# Altium PCB PCB1.PcbDoc
Units mil, origin at the board's own origin, x right, y up, seen from the top; angles counter-clockwise.
Board outline 6000 x 4000 mil, 2 copper layers (Top Layer, Bottom Layer); 23 components, 31 nets, 107 pads, 0 vias.
Unrouted connection lines stored in the file: 6.
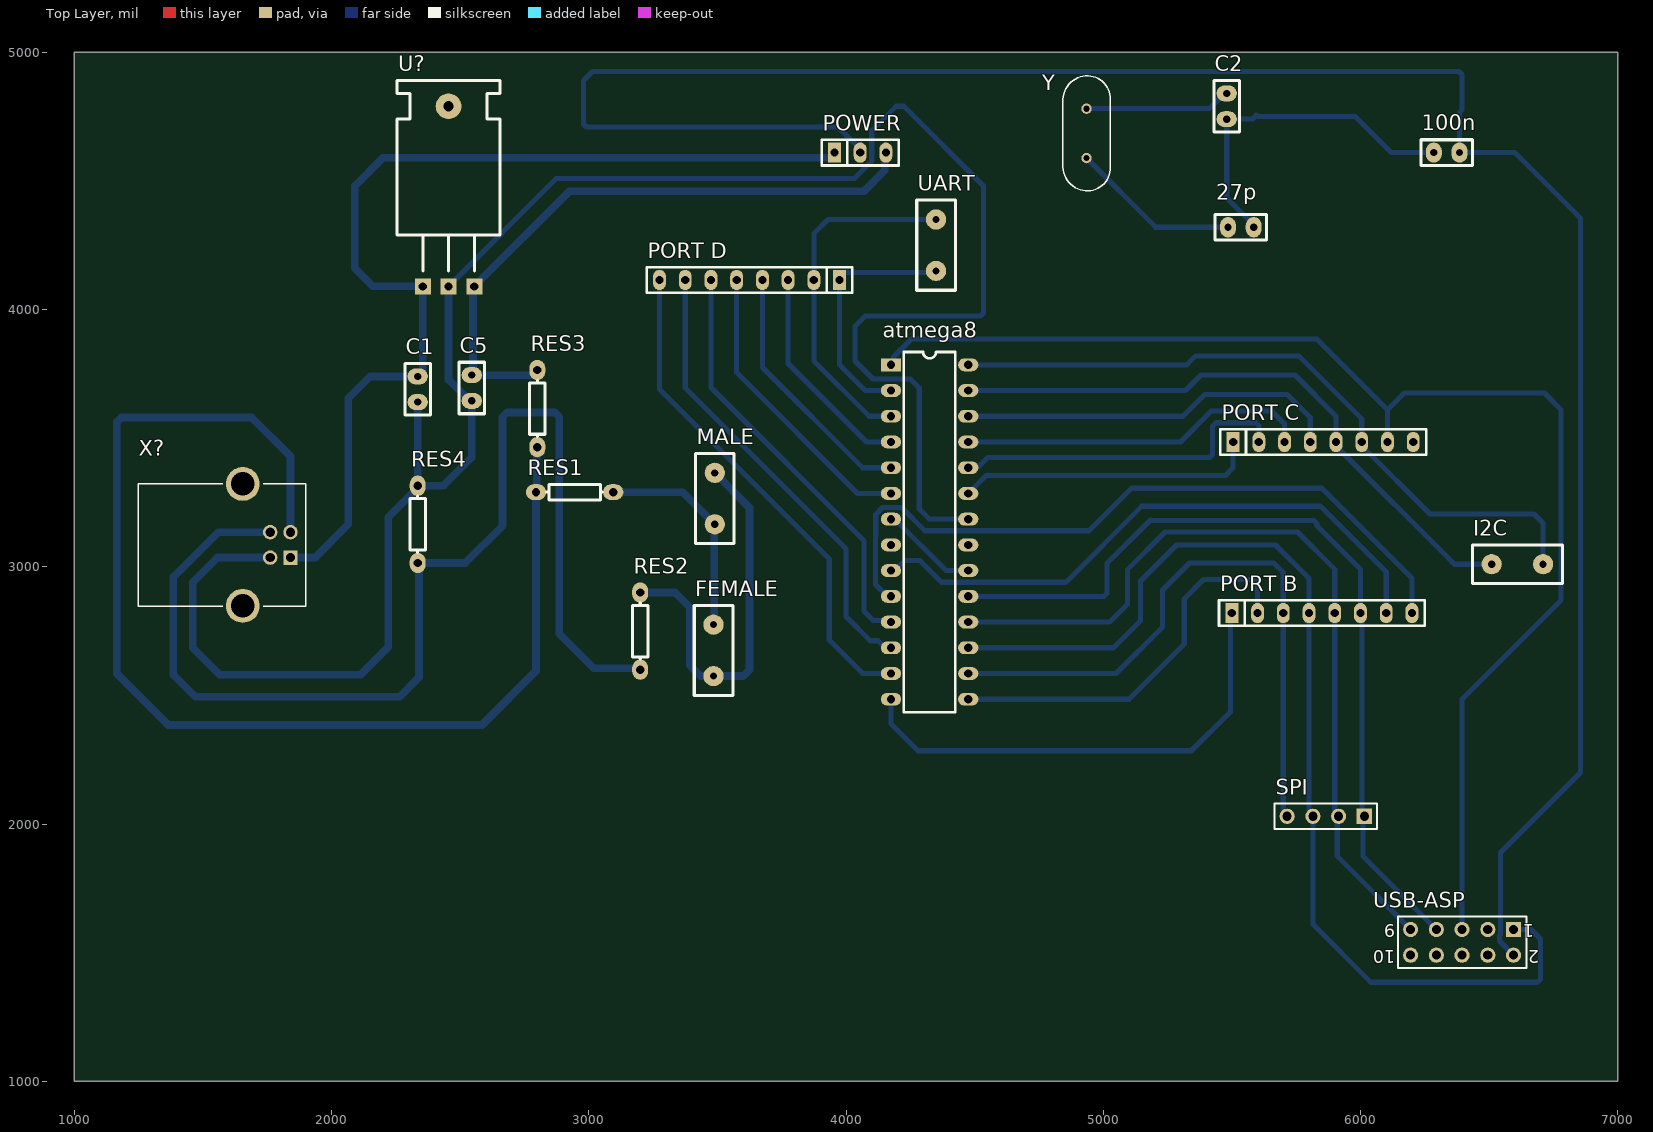
[diagram p0: Top Layer view]
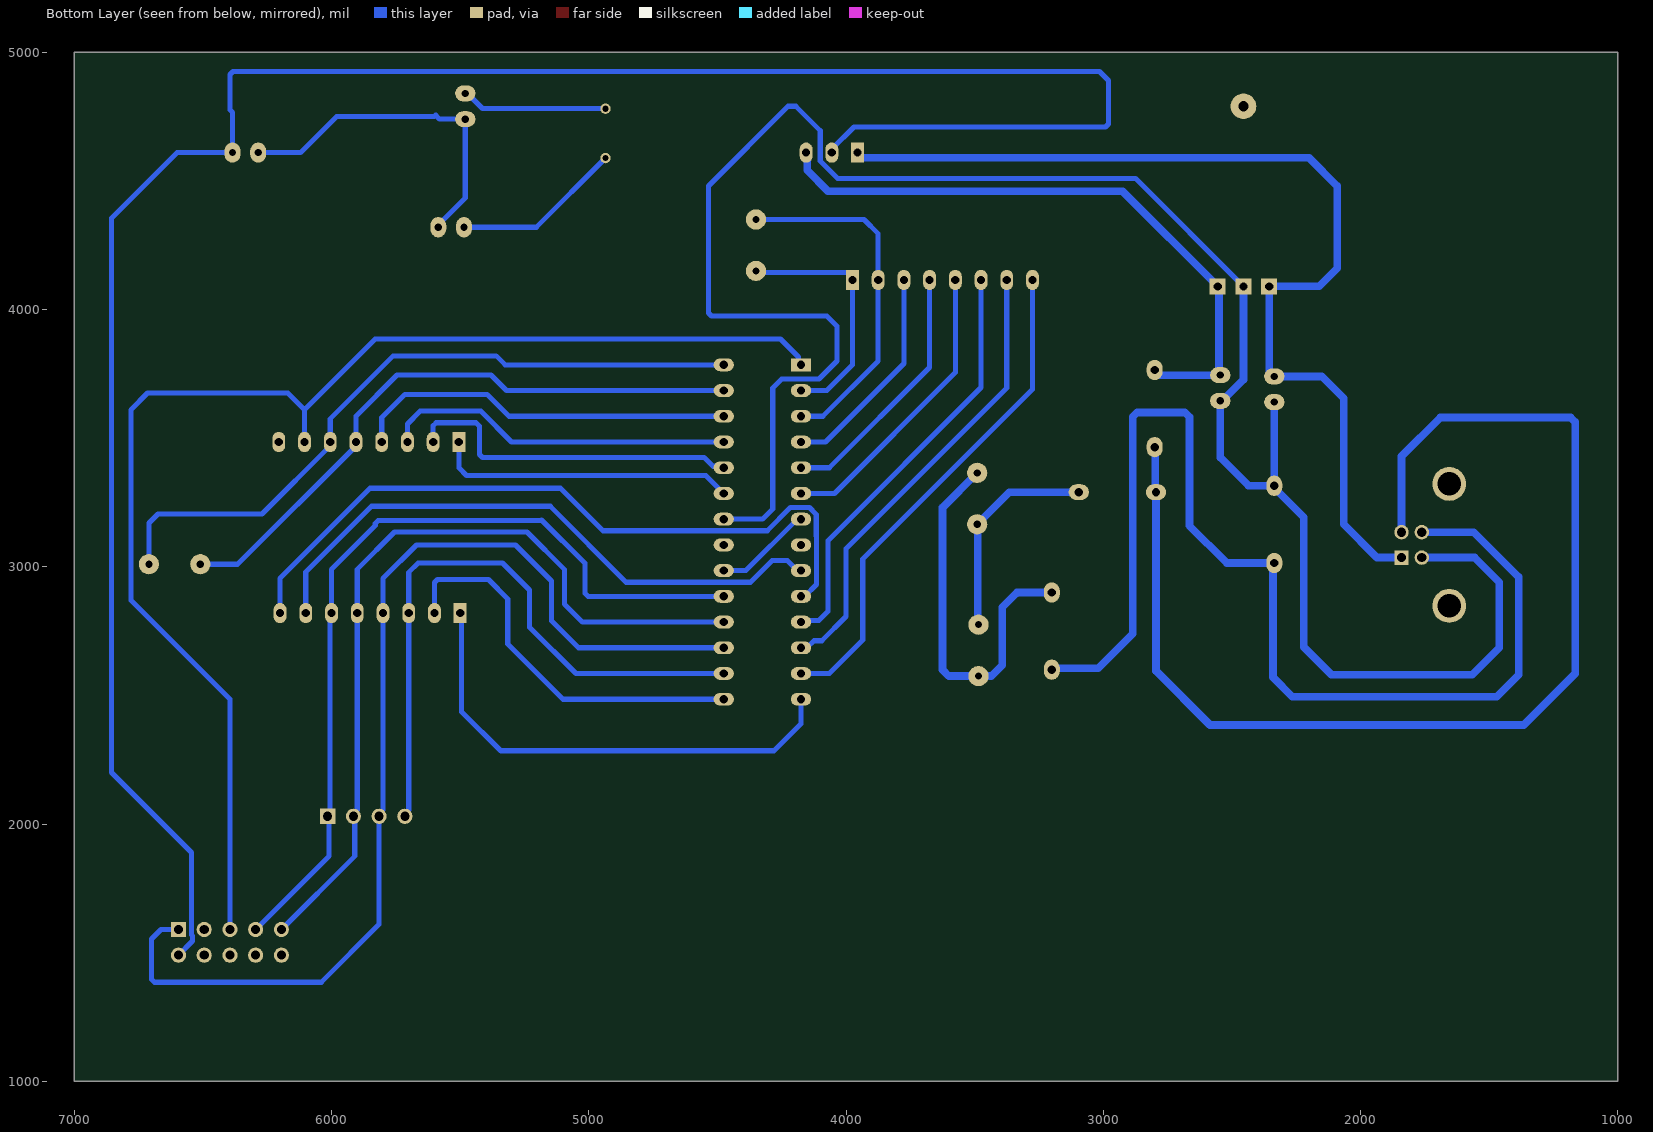
[diagram p1: Bottom Layer view, seen from below]

## Layer stack, top to bottom
Top Solder: solder mask 0.4, Solder Resist, Dk 3.5
Top Layer: signal copper 1.4
Dielectric 1: dielectric 12.6, FR-4, Dk 4.8
Bottom Layer: signal copper 1.4
Bottom Solder: solder mask 0.4, Solder Resist, Dk 3.5

## Board outline
1000,1000 7000,1000 7000,5000 1000,5000

## Design rules (kind name [scope] priority, off if disabled: settings)
Clearance [All] p1: gap=10 ignorepadtopadclearanceinfootprint=FALSE except(0: Arc-Hole Track-Hole SMDPad-Hole THPad-Hole Via-Hole Fill-Hole Poly-Hole Region-Hole Text-Hole; 25: Arc-Arc Arc-Track Track-Track)
PolygonConnect [All] p1: connectstyle=Relief reliefconductorwidth=10 reliefentries=4 polygonreliefangle="90 Angle" airgapwidth=10
RoomDefinition Sheet1 [InComponentClass('Sheet1')] p1: confinementstyle=ConfineIn formatcopy=TRUE lockcomponents=FALSE outline 7105,1110 9470,1110 9470,2630 7105,2630
RoutingLayers [All] p1: top layer_v5=FALSE bottom layer_v5=TRUE
RoutingVias [All] p1: holewidth=28 width=50 viastyle="Through Hole" minholewidth=28 minwidth=50 maxholewidth=28 maxwidth=50
SolderMaskExpansion [All] p1: expansion=4 istentingtop=FALSE
Width [All] p1: maxlimit=50 minlimit=10 preferedwidth=20 toplayer_maxwidth=10 toplayer_prefwidth=10 minimp=50.000000 maximp=50.000000 favimp=50.000000
29 further rules are at their usual default settings.

## Components (designator, comment, footprint, x,y, rotation, side; value= is the part's Value field where it differs from the comment)
27p "CAP" RAD0.1 5585,4320 r180 top
100n "CAP" RAD0.1 6385,4610 r180 top
atmega8 "ATmega8-16PI" PDIP28 4335,3525 r0 top
C1 "4u7" RAD0.1 2335,3640 r90 top
C2 "27p" RAD0.1 5480,4740 r90 top
C5 "4u7" RAD0.1 2545,3745 r270 top
FEMALE "HEADER 2" RAD0.2 3485,2775 r270 top
I2C "HEADER 2" RAD0.2 6510,3010 r0 top
MALE "HEADER 2" RAD0.2 3490,3165 r90 top
"PORT B" "HEADER 8" SIP8 5500,2820 r0 top
"PORT C" "HEADER 8" SIP8 5505,3485 r0 top
"PORT D" "HEADER 8" SIP8 3975,4115 r180 top
POWER "HEADER 3" SIP3 3955,4610 r0 top
RES1 "68" AXIAL0.3 2795,3290 r0 top
RES2 "68" AXIAL0.3 3200,2600 r90 top
RES3 "1K5" AXIAL0.3 2800,3465 r90 top
RES4 "1M" AXIAL0.3 2335,3315 r270 top
SPI "Header 4" HDR1X4 6015,2030 r180 top
U? "VOLTREG" TO-220 2355,4090 r0 top
UART "HEADER 2" RAD0.2 4350,4150 r90 top
USB-ASP "Header 5X2" HDR2X5 6595,1590 r180 top
X? "USB-B1HSB6" OST_USB-B1HSB6 1655,3085 r270 top
Y "ECS-240.0001-18-1X" XTAL_ECS-200-20-1X 4935,4685 r90 top

## Footprints (in the part's own frame and the unit in brackets; to place one, negate y for a bottom-side part, rotate by r counter-clockwise, add the part's x,y. Pads: shape width x height; smd on the part's side, far side on the other; paste and mask are expansions set on the pad)
AXIAL0.3 [mil]
  oval 78.74x62 hole 32: 1(0,0) 2(300,0)
  silkscreen extent 41,-30 259,30
HDR1X4 [mm] "Connector; Header; 4 Position"
  rect 1.5x1.5 hole 0.9: 1(0,0)
  round 1.5 hole 0.9: 2(2.54,0) 3(5.08,0) 4(7.62,0)
  silkscreen extent -1.27,-1.27 8.89,1.27
HDR2X5 [mm] "Connector; Header; 5x2 Position"
  rect 1.5x1.5 hole 0.9: 1(0,0)
  round 1.5 hole 0.9: 2(0,2.54) 3(2.54,0) 4(2.54,2.54) 5(5.08,0) 6(5.08,2.54) 7(7.62,0) 8(7.62,2.54) 9(10.16,0) 10(10.16,2.54)
  silkscreen extent -1.27,-1.27 11.43,3.81
OST_USB-B1HSB6 [mm]
  rect 1.428x1.428 / inner round 1.428 / far side rect 1.428x1.428 hole 0.92: 1(1.25,4.71)
  round 1.428 hole 0.92: 2(-1.25,4.71) 3(-1.25,2.71) 4(1.25,2.71)
  round 3.346 hole 2.33: P1(-6.02,0) P2(6.02,0)
  silkscreen extent -6.05,-10.3 6.05,6.2, body extent -7.42,-8.25 7.42,8.25, height 10.9
PDIP28 [mil]
  rect 78.74x50 hole 32: 1(-160,260)
  oval 78.74x50 hole 32: 2(-160,160) 3(-160,60) 4(-160,-40) 5(-160,-140) 6(-160,-240) 7(-160,-340) 8(-160,-440) 9(-160,-540) 10(-160,-640) 11(-160,-740) 12(-160,-840) 13(-160,-940) 14(-160,-1040) 15(140,-1040) 16(140,-940) 17(140,-840) 18(140,-740) 19(140,-640) 20(140,-540) 21(140,-440) 22(140,-340) 23(140,-240) 24(140,-140) 25(140,-40) 26(140,60) 27(140,160) 28(140,260)
  silkscreen extent -110,-1090 90,310
RAD0.1 [mil]
  oval 62x78.74 hole 28: 1(0,0) 2(100,0)
  silkscreen extent -50,-50 150,50
RAD0.2 [mm]
  round 2 hole 0.711: 1(0,0) 2(5.08,0)
  silkscreen extent -1.91,-1.91 6.98,1.91
SIP3 [mil]
  rect 50x78.74 hole 32: 1(0,0)
  oval 50x78.74 hole 32: 2(100,0) 3(200,0)
  silkscreen extent -50,-50 250,50
SIP8 [mil]
  rect 50x78.74 hole 32: 1(0,0)
  oval 50x78.74 hole 32: 2(100,0) 3(200,0) 4(300,0) 5(400,0) 6(500,0) 7(600,0) 8(700,0)
  silkscreen extent -50,-50 750,50
TO-220 [mil]
  round 100 hole 40: 0(100,700)
  rect 62x62 hole 32: 1(0,0) 2(100,0) 3(200,0)
  silkscreen extent -100,60 300,800
XTAL_ECS-200-20-1X [mm]
  round 1.03 hole 0.63: 1(-2.44,0) 2(2.44,0)
  silkscreen extent -5.68,-2.33 5.68,2.33

## Part data
27p 100n: "Capacitor"
atmega8: "AVR 8K Bytes of In-System Programmable Flash Memory", ComponentLink1Description="Manufacturer Link", ComponentLink1URL=http://www.atmel.com, ComponentLink2Description=Datasheet, ComponentLink2URL=http://www.atmel.com/dyn/resources/prod_documents/doc2486.pdf, DatasheetVersion=2486H-AVR-09/02, LatestRevisionDate=04-Mar-2005, LatestRevisionNote="Stylized 3D Model Added.", PackageDescription="DIP; 28 Leads; Row Spacing 7.62 mm; Pitch 2.54 mm", PackageReference=28P3, PackageVersion="revB, Sep-2001", Published=17-Sep-2003, Publisher="Altium Limited"
C1 C2 C5: library part CAP, "Capacitor"
"PORT B" "PORT C" "PORT D": "8 Pin Header"
RES1 RES2 RES3 RES4: library part RES2
SPI: "Header, 4-Pin", LatestRevisionDate=17-Jul-2002, LatestRevisionNote="Re-released for DXP Platform.", Publisher="Altium Limited"
USB-ASP: "Header, 5-Pin, Dual row", LatestRevisionDate=17-Jul-2002, LatestRevisionNote="Re-released for DXP Platform.", Publisher="Altium Limited"
X?: "USB-B (USB TYPE-B) - Receptacle Connector 4 Position Through Hole, Right Angle", Package=None, Availability="In Stock", Check_prices=https://www.snapeda.com/parts/USB-B1HSB6/On+Shore+Technology+Inc./view-part/?ref=eda, MF="On Shore", MP=USB-B1HSB6, Price=None, Purchase-URL=https://pricing.snapeda.com/search/part/USB-B1HSB6/?ref=eda, SnapEDA_Link=https://www.snapeda.com/parts/USB-B1HSB6/On+Shore+Technology+Inc./view-part/?ref=snap
Y: "Crystals / Oscillators / Resonators 24.00014MHz 18pF", Package="HC49/U ECS International", Availability=Unavailable, MF="ECS International", MP=ECS-240.0001-18-1X, Price=None, SnapEDA_Link=https://www.snapeda.com/parts/ECS-240.0001-18-1X/ECS%20International/view-part/259232/?ref=snap

## Nets (pads, with @x,y where several pads share a name; then routed paths per layer and width w, separated by ;. In a path a pad name is that pad's centre, name@x,y a point inside that pad or via, vN(x,y) a via of type N, cw(c..) or ccw(c..) an arc to the next point about the centre after c; other vN are vias at no path point)
GND: 27p.1 100n.2 atmega8.8 atmega8.22 C1.1 C2.1 C5.2 RES4.1 U?.2 USB-ASP.10 X?.4 | length 9429.2
  Bottom Layer w20: U?.2 2875,4510 4033.01,4510 4100,4576.99 4100,4695 4195,4790 4225,4790 4535,4480 4535,3986.72 4523.28,3975 4075,3975 4035,3935 4035,3800 4105,3730 4250,3730 4285,3695 4285,3225 4325,3185 atmega8.22 ; 27p.1 5585,4328.37 5480,4433.37 C2.1 5580,4740 5595,4755 5600,4750 5980,4750 6120,4610 100n.2
  Bottom Layer w30: X?.4 1555.79,3035.79 1460,2940 1460,2685 1565,2580 2112.43,2580 2220.65,2688.23 2220.65,3192.28 2335,3306.63 RES4.1 ; C1.1 RES4.1 ; U?.2 2455,3726.63 2536.63,3645 C5.2 2545,3425 2435,3315 RES4.1
Net27p_2: 27p.2 "PORT B.8" atmega8.10 Y.1 | length 3494.5
  Bottom Layer w20: atmega8.10 4160.63,2885 4115,2930.63 4115,3120 4115.63,3120.63 4115.63,3203.64 4141.99,3230 4216.36,3230 4306.36,3140 4945,3140 5110,3305 5850,3305 6200,2955 6200,2820 ; Y.1 5203.94,4320 27p.2
Net100n_1: 100n.1 atmega8.7 atmega8.20 POWER.2 USB-ASP.2 | length 9016.5
  Bottom Layer w20: POWER.2 4055,4624.37 3969.37,4710 2991.72,4710 2980,4721.72 2980,4890 3015,4925 6383.28,4925 6395,4913.28 6395,4776.51 6385,4766.51 100n.1 6600,4610 6855,4355 6855,2200 6544.53,1889.53 6544.53,1569.48 6540,1564.96 6540,1545 USB-ASP.2 ; atmega8.7 4189.37,3185 4389.37,2985 atmega8.20
Netatmega8_1: "PORT C.7" atmega8.1 USB-ASP.5 | length 5130.4
  Bottom Layer w20: atmega8.1 4185,3795 4185,3815 4255,3885 5830,3885 6105,3610 ; 6105,3485 6105,3610 ; USB-ASP.5 6395,2485 6780,2870 6780,3610 6715,3675 6170,3675 6105,3610
Netatmega8_2: "PORT D.1" atmega8.2 UART.1 | length 969.3
  Bottom Layer w20: atmega8.2 4075,3685 3975,3785 3975,4115 3975,4129.37 3990,4144.37 4344.37,4144.37 UART.1
Netatmega8_3: "PORT D.2" atmega8.3 UART.2 | length 1381.8
  Bottom Layer w20: atmega8.3 4090,3585 3875,3800 3875,4115 3875,4295 3930,4350 UART.2
Netatmega8_4: "PORT D.3" atmega8.4 | length 851.3
  Bottom Layer w20: 3775,4115 3775,3790 4080,3485 atmega8.4
Netatmega8_5: "PORT D.4" atmega8.5 | length 1001.5
  Bottom Layer w20: 3675,4115 3675,3775 4065,3385 atmega8.5
Netatmega8_6: "PORT D.5" atmega8.6 | length 1154.7
  Bottom Layer w20: 3575,4115 3575,3755 4045,3285 atmega8.6
Netatmega8_9: "PORT B.7" atmega8.9 C2.2 Y.2 | length 2933.1
  Bottom Layer w20: atmega8.9 4189.37,2985 4228.26,3023.89 4286.84,3023.89 4370.73,2940 4855,2940 5150,3235 5845,3235 6100,2980 6100,2820 ; Y.2 5412.69,4781.06 5471.63,4840 C2.2
Netatmega8_11: "PORT D.6" atmega8.11 | length 1657
  Bottom Layer w20: 3475,4115 3475,3696.36 4070,3101.36 4070,2826.72 4105.98,2790.74 4169.26,2790.74 atmega8.11
Netatmega8_12: "PORT D.7" atmega8.12 | length 1792.6
  Bottom Layer w20: 3375,4115 3375,3695 4000,3070 4000,2806.72 4094.14,2712.57 4124.94,2712.57 4152.51,2685 atmega8.12
Netatmega8_13: "PORT D.8" atmega8.13 | length 1967.2
  Bottom Layer w20: 3275,4115 3275,3690 3935,3030 3935,2715 4065,2585 atmega8.13
Netatmega8_14: "PORT B.1" atmega8.14 | length 1908.2
  Bottom Layer w20: atmega8.14 4175,2390 4280,2285 5340,2285 5341.72,2283.28 5495,2436.57 5495,2815 5500,2820
Netatmega8_15: "PORT B.2" atmega8.15 | length 1543.3
  Bottom Layer w20: atmega8.15 5100,2485 5315,2700 5315,2875 5390,2950 5588.28,2950 5600,2938.28 5600,2820
Netatmega8_16: "PORT B.3" atmega8.16 SPI.4 | length 2457.8
  Bottom Layer w20: atmega8.16 5050,2585 5230,2765 5230,2910 5335,3015 5663.28,3015 5700,2978.28 5700,2820 5700,2055.57 5715,2040.57 SPI.4
Netatmega8_17: "PORT B.4" atmega8.17 SPI.3 USB-ASP.1 | length 4246.4
  Bottom Layer w20: atmega8.17 5040,2685 5145,2790 5145,2945 5285,3085 5670,3085 5800,2955 5800,2820 5800,2055.57 5815,2040.57 SPI.3 5815,1610 6040,1385 6688.28,1385 6700,1396.72 6700,1553.28 6663.28,1590 USB-ASP.1
Netatmega8_18: "PORT B.5" atmega8.18 SPI.2 USB-ASP.9 | length 3235.5
  Bottom Layer w20: atmega8.18 5025,2785 5095,2855 5095,2990 5240,3135 5755,3135 5900,2990 5900,2820 5900,2055.57 5915,2040.57 SPI.2 5910,2025 5910,1875 USB-ASP.9
Netatmega8_19: "PORT B.6" atmega8.19 SPI.1 USB-ASP.7 | length 3326.9
  Bottom Layer w20: atmega8.19 5003.28,2885 5015,2896.72 5015,3013.43 5183.28,3181.72 5185,3180 5818.28,3180 5830,3168.28 5830,3160 6000,2990 6000,2820 6005.74,2814.26 6005.74,2039.26 SPI.1 6010,2025 6010,1875 USB-ASP.7
Netatmega8_23: "PORT C.1" atmega8.23 | length 1171.4
  Bottom Layer w20: atmega8.23 4545,3355 5475,3355 5505,3385 5505,3485
Netatmega8_24: "PORT C.2" atmega8.24 | length 1334.9
  Bottom Layer w20: atmega8.24 4480.74,3390.74 4517.1,3390.74 4551.36,3425 5413.28,3425 5425,3436.72 5425,3546.36 5438.64,3560 5593.28,3560 5605,3548.28 5605,3485
Netatmega8_25: "PORT C.3" atmega8.25 | length 1370.4
  Bottom Layer w20: atmega8.25 5300,3485 5420,3605 5655,3605 5705,3555 5705,3485
Netatmega8_26: "PORT C.4" atmega8.26 | length 1497.5
  Bottom Layer w20: atmega8.26 5310,3585 5395,3670 5715,3670 5805,3580 5805,3485
Netatmega8_27: "PORT C.5" atmega8.27 I2C.1 | length 2431.7
  Bottom Layer w20: atmega8.27 5320,3685 5380,3745 5745,3745 5905,3585 5905,3485 5905,3470 6365,3010 I2C.1
Netatmega8_28: "PORT C.6" atmega8.28 I2C.2 | length 2739.9
  Bottom Layer w20: atmega8.28 5325,3785 5360,3820 5760,3820 6005,3575 6005,3485 6005,3470.63 6270.63,3205 6675,3205 6710,3170 I2C.2
NetC1_2: C1.2 POWER.1 U?.1 X?.1 | length 3970.3
  Bottom Layer w30: X?.1 1935.79,3035.79 2065,3165 2065,3655 2150,3740 C1.2 2335,3740.29 2355,3760.29 U?.1 2160,4090 2090,4160 2090,4480 2200,4590 3945,4590 3955,4600 POWER.1
NetC5_1: C5.1 POWER.3 RES3.2 U?.3 | length 2465.9
  Bottom Layer w30: RES3.2 2799.71,3765 2779.71,3745 C5.1 2550,3750 2550,4085 U?.3 2925,4460 4070,4460 4151.17,4541.17 4151.17,4606.17 POWER.3
NetFEMALE_1: FEMALE.1 MALE.1 RES1.2 | length 838.8
  Bottom Layer w30: RES1.2 3365,3290 MALE.1 3487.5,3162.5 3487.5,2777.5 FEMALE.1
NetFEMALE_2: FEMALE.2 MALE.2 RES2.2 | length 1522.7
  Bottom Layer w30: RES2.2 3335,2900 3349.99,2885.01 3392.49,2842.51 3392.49,2617.51 3435,2575 FEMALE.2 3600,2575 3625,2600 3625,3230 MALE.2
NetRES1_1: RES1.1 RES3.1 X?.2 | length 4689.7
  Bottom Layer w30: X?.2 1840.43,3429.57 1690,3580 1182.57,3580 1165,3562.43 1165,2585 1365,2385 2585,2385 2795,2595 RES1.1 2797.5,3292.5 2797.5,3462.5 RES3.1
NetRES2_1: RES2.1 RES4.2 X?.3 | length 4559.7
  Bottom Layer w30: X?.3 1559.21,3134.21 1385,2960 1385,2580 1470,2495 2265,2495 2340,2570 2340,3010 RES4.2 2520,3015 2665,3160 2665,3582.43 2682.57,3600 2867.43,3600 2885,3582.43 2885,2740 3020,2605 3195,2605 RES2.1
pads on no net: "PORT C.8" atmega8.21 U?.0 USB-ASP.3 USB-ASP.4 USB-ASP.6 USB-ASP.8 X?.P1 X?.P2

## Text inside footprints (layer, text, board x,y; h text height)
USB-ASP: Top Overlay "2" at 6695,1510 h50 r180; Top Overlay "1" at 6675,1610 h50 r180; Top Overlay "9" at 6135,1610 h50 r180; Top Overlay "10" at 6135,1510 h50 r180